# EAGLE board Stepper Driver Tester Rev A (EAGLE 7.2.0)
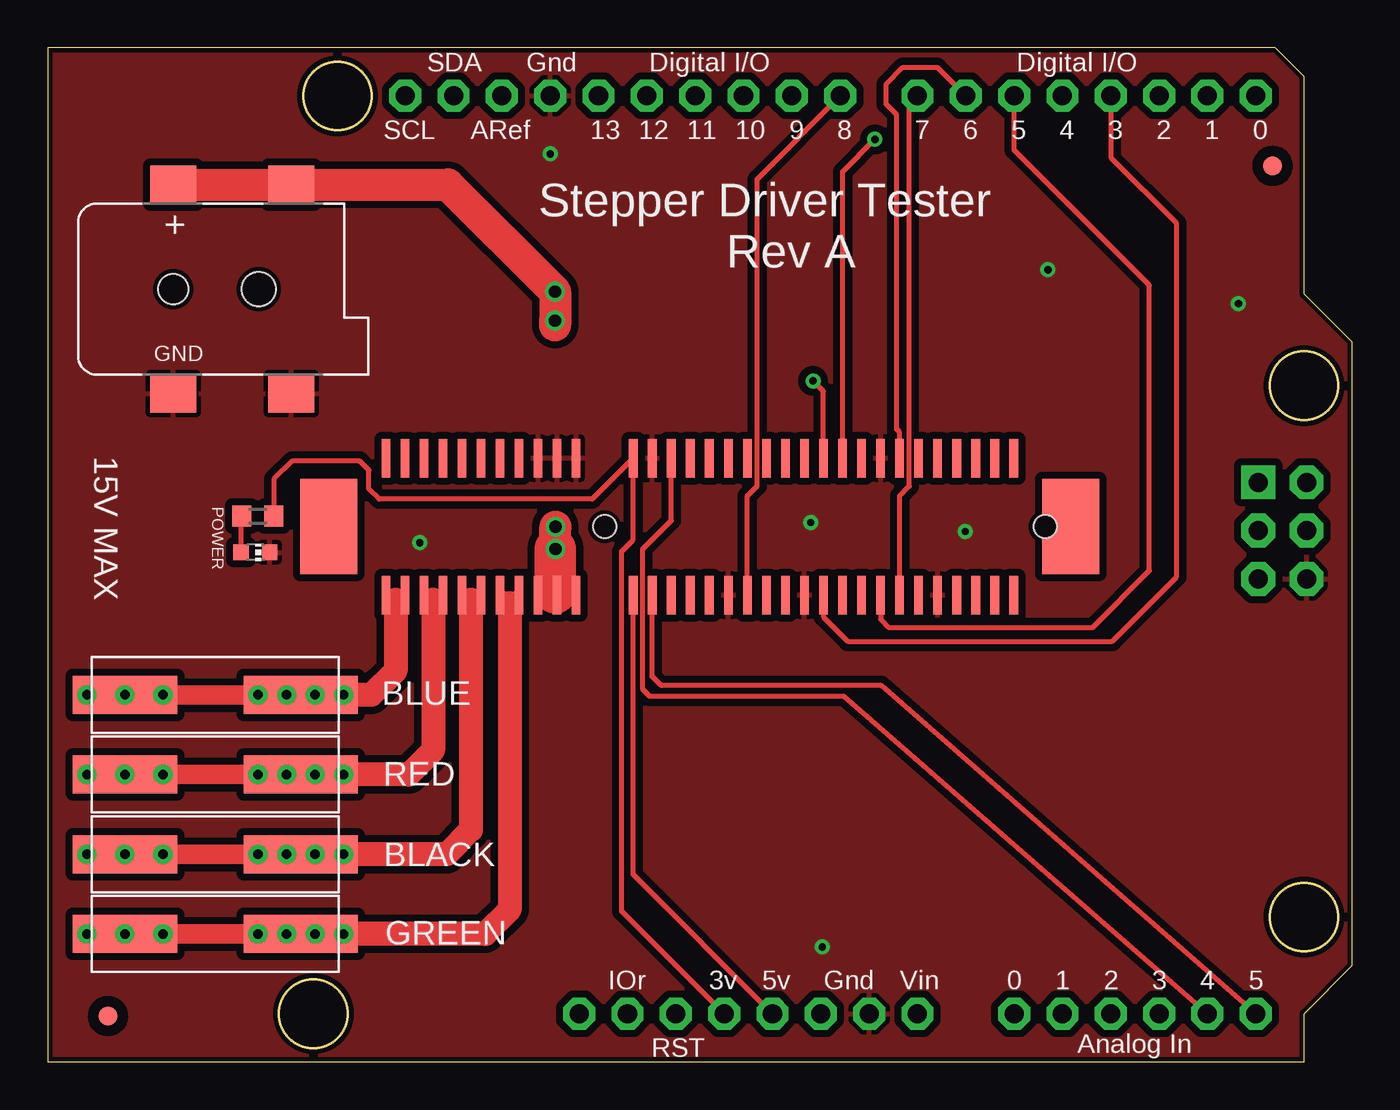
[diagram p0: board, top side]
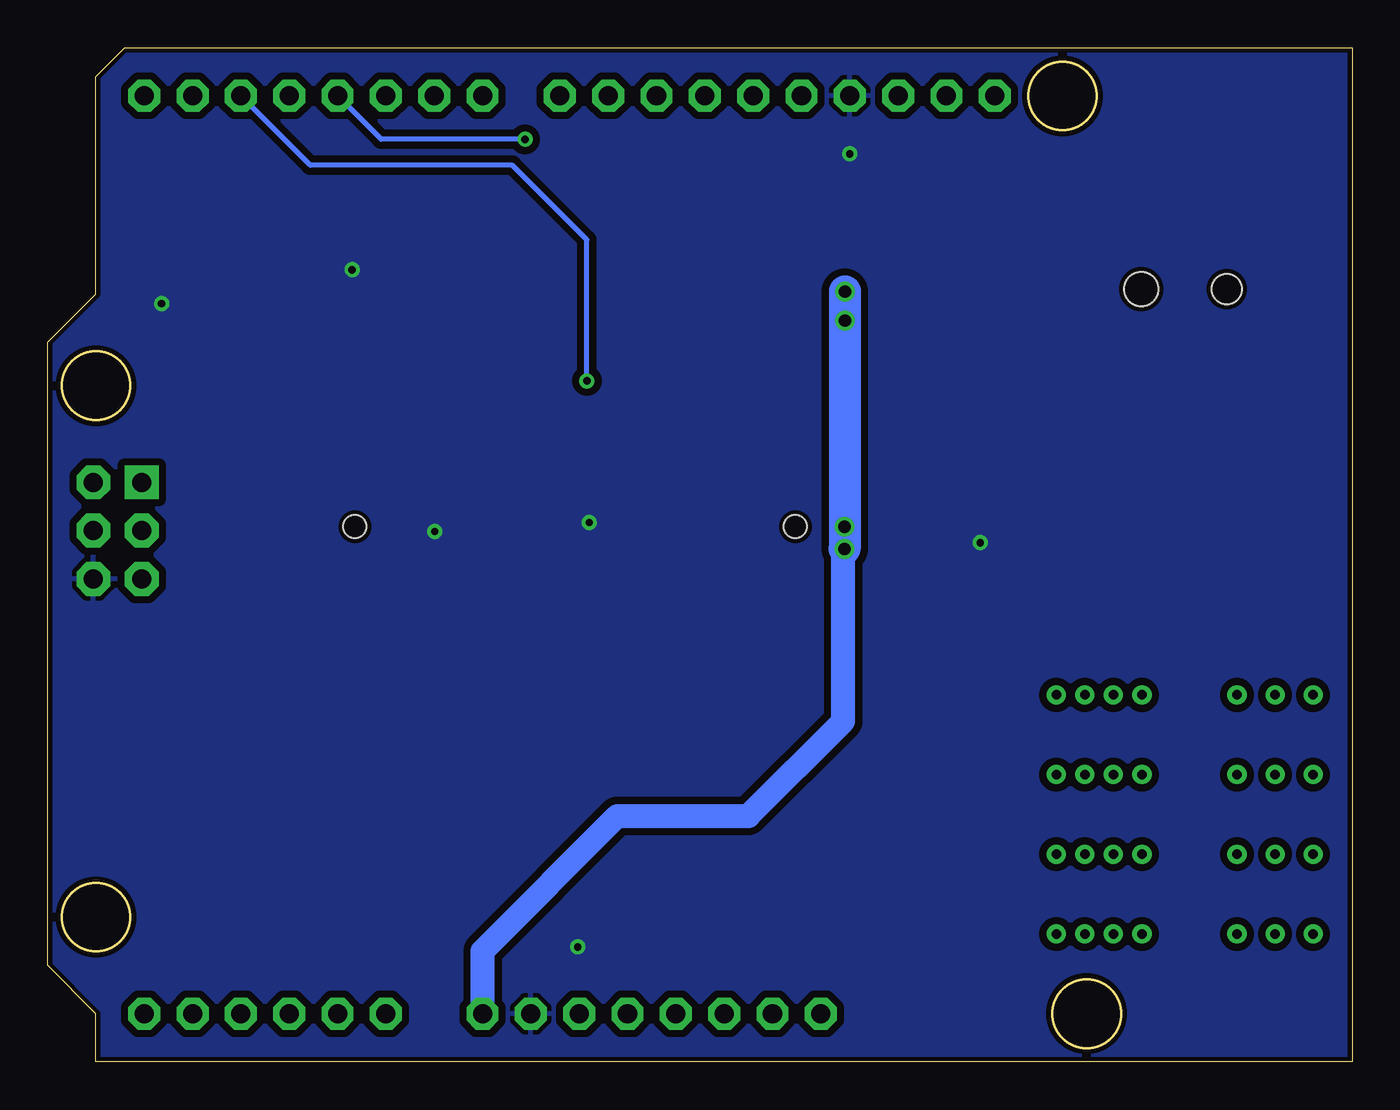
[diagram p1: board, bottom side, seen from below]

Size 68.58 x 53.34 mm. Coordinates in mm from the lower left corner, seen from the top.
Copper layers (1*16): Top 0.035mm / dielectric 1.5mm / Bottom 0.035mm
Design rules "default *": minimum track width 10mil, minimum drill 24mil, track to track 15mil, track to pad 15mil, pad to pad 8mil, via to via 8mil, smd to smd 8mil, copper to edge 10mil, drill to drill 8mil, minimum pad ring 10mil, minimum via ring 8mil, stop-mask expansion 4mil, vias tented up to drill 1mm, thermal gap 10mil

## Footprints (pad centres in the part's own frame; a part is rotated, then mirrored left to right if it is on the bottom)
104188-0110 = smd 5.5 x 2: 1@1 0,0 | smd 6 x 2: 1@2 9.25,0 | drill 0.5: 1@3 -2,0; 1@4 0,0; 1@5 2,0; 1@6 7,0; 1@7 8.5,0; 1@9 10,0; 1@10 11.5,0
DCJACK_2MM_SMT = smd 2.4 x 2: GND 0,-5.5; GNDBREAK 6.2,-5.5; PWR1 0,5.5; PWR2 6.2,5.5 | hole 1.6: 0,0 | hole 1.8: 4.5,0
ARDUINOR3_ICSP = drill 1 pad 1.676 octagon: 3V 35.56,2.54; 5V 38.1,2.54; A0 50.8,2.54; A1 53.34,2.54; A2 55.88,2.54; A3 58.42,2.54; A4 60.96,2.54; A5 63.5,2.54; AREF 23.876,50.8; D0 63.5,50.8; D1 60.96,50.8; D2 58.42,50.8; D3 55.88,50.8; D4 53.34,50.8; D5 50.8,50.8; D6 48.26,50.8; D7 45.72,50.8; D8 41.656,50.8; D9 39.116,50.8; D10 36.576,50.8; D11 34.036,50.8; D12 31.496,50.8; D13 28.956,50.8; GND 26.416,50.8; GND@1 43.18,2.54; GND@2 40.64,2.54; IOREF 30.48,2.54; RESERVED 27.94,2.54; RESET 33.02,2.54; SCL 18.796,50.8; SDA 21.336,50.8; VIN 45.72,2.54 | drill 1 pad 1.778 octagon: 5V_ICSP 66.167,30.48; GND@3 66.167,25.4; MOSI 66.167,27.94; RESET_ICSP 63.627,25.4; SCK 63.627,27.94 | drill 1 pad 1.778 square: MISO 63.627,30.48
CHIP-LED0603 = smd 0.8 x 0.8: A 0,-0.75; C 0,0.75
R0603 = smd 1 x 1.1: 1 -0.85,0; 2 0.85,0
10076266-100CLF = smd 0.457 x 2.032: P$1 0,0; P$2 1,0; P$3 2,0; P$4 3,0; P$5 4,0; P$6 5,0; P$7 6,0; P$8 7,0; P$9 8,0; P$10 9,0; P$11 10,0; P$12 13,0; P$13 14,0; P$14 15,0; P$15 16,0; P$16 17,0; P$17 18,0; P$18 19,0; P$19 20,0; P$20 21,0; P$21 22,0; P$22 23,0; P$23 24,0; P$24 25,0; P$25 26,0; P$26 27,0; P$27 28,0; P$28 29,0; P$29 30,0; P$30 31,0; P$31 32,0; P$32 33,0; P$33 0,-7.2; P$34 1,-7.2; P$35 2,-7.2; P$36 3,-7.2; P$37 4,-7.2; P$38 5,-7.2; P$39 6,-7.2; P$40 7,-7.2; P$41 8,-7.2; P$42 9,-7.2; P$43 10,-7.2; P$44 13,-7.2; P$45 14,-7.2; P$46 15,-7.2; P$47 16,-7.2; P$48 17,-7.2; P$49 18,-7.2; P$50 19,-7.2; P$51 20,-7.2; P$52 21,-7.2; P$53 22,-7.2; P$54 23,-7.2; P$55 24,-7.2; P$56 25,-7.2; P$57 26,-7.2; P$58 27,-7.2; P$59 28,-7.2; P$60 29,-7.2; P$61 30,-7.2; P$62 31,-7.2; P$63 32,-7.2; P$64 33,-7.2 | smd 3 x 5: SOLDER-NAIL@1 -3,-3.6; SOLDER-NAIL@2 36,-3.6 | hole 1.2: 11.5,-3.6; 34.65,-3.6
FIDUCIAL_1MM = smd 1 x 1: 1 0,0

## Placement (x,y rotation side)
BLACK  104188-0110  [104188-0110]  4.06,10.92 0 top
BLUE  104188-0110  [104188-0110]  4.06,19.3 0 top
CN1  [DCJACK_2MM_SMT]  6.6,40.64 0 top
GREEN  104188-0110  [104188-0110]  4.06,6.73 0 top
M2  ARDUINO_R3_ICSP  [ARDUINOR3_ICSP]  0,0 0 top
POWER  [CHIP-LED0603]  10.92,26.8 270 top
R1  460  [R0603]  11.05,28.7 180 top
RED  104188-0110  [104188-0110]  4.06,15.11 0 top
U$1  10061913-101CLF  [10076266-100CLF]  17.78,31.75 0 top
U$2  FIDUCIAL  [FIDUCIAL_1MM]  3.17,2.41 0 top
U$3  FIDUCIAL  [FIDUCIAL_1MM]  64.39,47.12 0 top

## Library data of the parts
BLACK BLUE GREEN RED U$1 = PocketNC
CN1 M2 POWER R1 U$2 U$3 = adafruit

## Nets
3V: M2.3V R1.1 U$1.P$12
5V: M2.5V U$1.P$44
DIR-X: M2.D5 U$1.P$57
DIR-Y: M2.D6 U$1.P$26
DIR-Z: M2.D7 U$1.P$58
ENBL: M2.D8 U$1.P$50
GND: CN1.GND CN1.GNDBREAK M2.GND M2.GND@1 M2.GND@3 POWER.C U$1.P$9 U$1.P$10 U$1.P$11 U$1.P$13 U$1.P$25 U$1.P$49 U$1.P$53 U$1.P$60
N$1: POWER.A R1.2
N$6: BLUE.1@1 U$1.P$33 U$1.P$34
N$9: GREEN.1@1 U$1.P$39 U$1.P$40
N$10: RED.1@1 U$1.P$35 U$1.P$36
N$11: BLACK.1@1 U$1.P$37 U$1.P$38
SCL: M2.A5 U$1.P$45
SDA: M2.A4 U$1.P$14
STEP-X: M2.D2 U$1.P$22
STEP-Y: M2.D3 U$1.P$54
STEP-Z: M2.D4 U$1.P$23
VCC: CN1.PWR1 M2.VIN U$1.P$41 U$1.P$42 U$1.P$43

## Tracks (layer width: path | path; a pad name or v marks a point on that pad's centre or on a via)
3V
  Top 0.254: M2.3V 30.18,7.92 30.18,26.85 30.78,27.45 U$1.P$12 28.62,29.59 17.42,29.59 16.89,30.12 16.89,31.11 16.41,31.6 12.85,31.6 11.9,30.64 R1.1
5V
  Top 0.254: M2.5V 30.78,9.86 U$1.P$44
DIR-X
  Top 0.254: U$1.P$57 43.78,23.28 44.2,22.86 54.94,22.86 57.91,25.83 57.91,40.84 50.8,47.95 M2.D5
DIR-Y
  Top 0.254: U$1.P$26 44.78,33.12 44.63,33.27 44.63,49.81 44.07,50.37 44.07,51.41 44.96,52.3 46.76,52.3 M2.D6
DIR-Z
  Top 0.254: U$1.P$58 44.78,29.77 45.29,30.28 45.29,50.37 M2.D7
ENBL
  Top 0.254: U$1.P$50 36.78,29.77 37.29,30.28 37.29,46.43 M2.D8
GND  (via drill 0.38)
  other vias: 19.56,27.3 48.23,27.89 40.11,28.37 62.59,39.88 52.58,41.66 40.72,6.05 26.42,47.75
  pour Top: 0.25,53.21 70.1,53.34 70.23,-0.13 -0.13,-0.25
  pour Bottom: -0.25,53.21 70.87,53.34 71.5,-0.13 -0.13,-0.25
N$1
  Top 0.254: POWER.A 10.17,28.68 R1.2
N$6
  Top 0.406: U$1.P$33 18.03,24.55 18.29,24.3 18.54,24.55 U$1.P$34
  Top 1.27: 18.29,24.3 18.29,20.57 17.02,19.3 13.56,19.3
N$9
  Top 0.406: U$1.P$39 24.03,24.55 24.28,24.3 | U$1.P$40 24.54,24.55 24.28,24.3 | 24.28,24.3 24.28,24.13
  Top 1.27: 24.28,24.13 24.28,8 23.01,6.73 13.56,6.73
N$10
  Top 0.406: U$1.P$35 20.02,24.55 20.27,24.3 20.52,24.55 U$1.P$36
  Top 1.27: 20.27,24.3 20.27,16.38 19,15.11 13.56,15.11
N$11
  Top 0.406: U$1.P$37 22,24.55 22.25,24.3 22.5,24.55 U$1.P$38
  Top 1.27: 22.25,24.3 22.25,12.19 20.98,10.92 13.56,10.92
SCL
  Top 0.254: M2.A5 43.81,19.79 32.26,19.79 31.78,20.27 U$1.P$45
SDA
  Top 0.254: M2.A4 41.83,19.23 31.65,19.23 31.29,19.58 31.29,26.98 32.78,28.46 U$1.P$14
STEP-X  (via drill 0.38)
  Top 0.254: U$1.P$22 40.78,35.27 v40.23,35.81
  Bottom 0.254: v40.23,35.81 40.23,43.23 44.15,47.14 54.76,47.14 M2.D2
STEP-Y
  Top 0.254: U$1.P$54 40.78,23.41 42.06,22.12 55.96,22.12 59.33,25.5 59.33,44.09 55.91,47.52 55.91,50.77 M2.D3
STEP-Z  (via drill 0.38)
  Top 0.254: U$1.P$23 41.78,46.81 v43.48,48.51
  Bottom 0.254: v43.48,48.51 51.05,48.51 M2.D4
VCC  (via drill 0.64)
  Top 0.254: U$1.P$41 U$1.P$42 U$1.P$43 | v26.7,28.14 26.67,28.55
  Top 1.676: CN1.PWR1 21.04,46.14 v26.67,40.51 v26.67,38.99 26.67,38.73 | 26.67,24.66 U$1.P$42 | v26.7,26.98 v26.7,28.14
  Top 2.184: v26.7,26.98 26.67,24.66
  Bottom 1.27: M2.VIN 45.72,5.84 38.63,12.93 31.75,12.93 26.77,17.91 26.77,26.9 v26.7,26.98
  Bottom 1.676: v26.67,40.51 v26.7,26.98

## Text on the board
tNames: Stepper Driver Tester | Rev A | 15V MAX